# EAGLE board IAS_v005 (EAGLE 7.3.0)
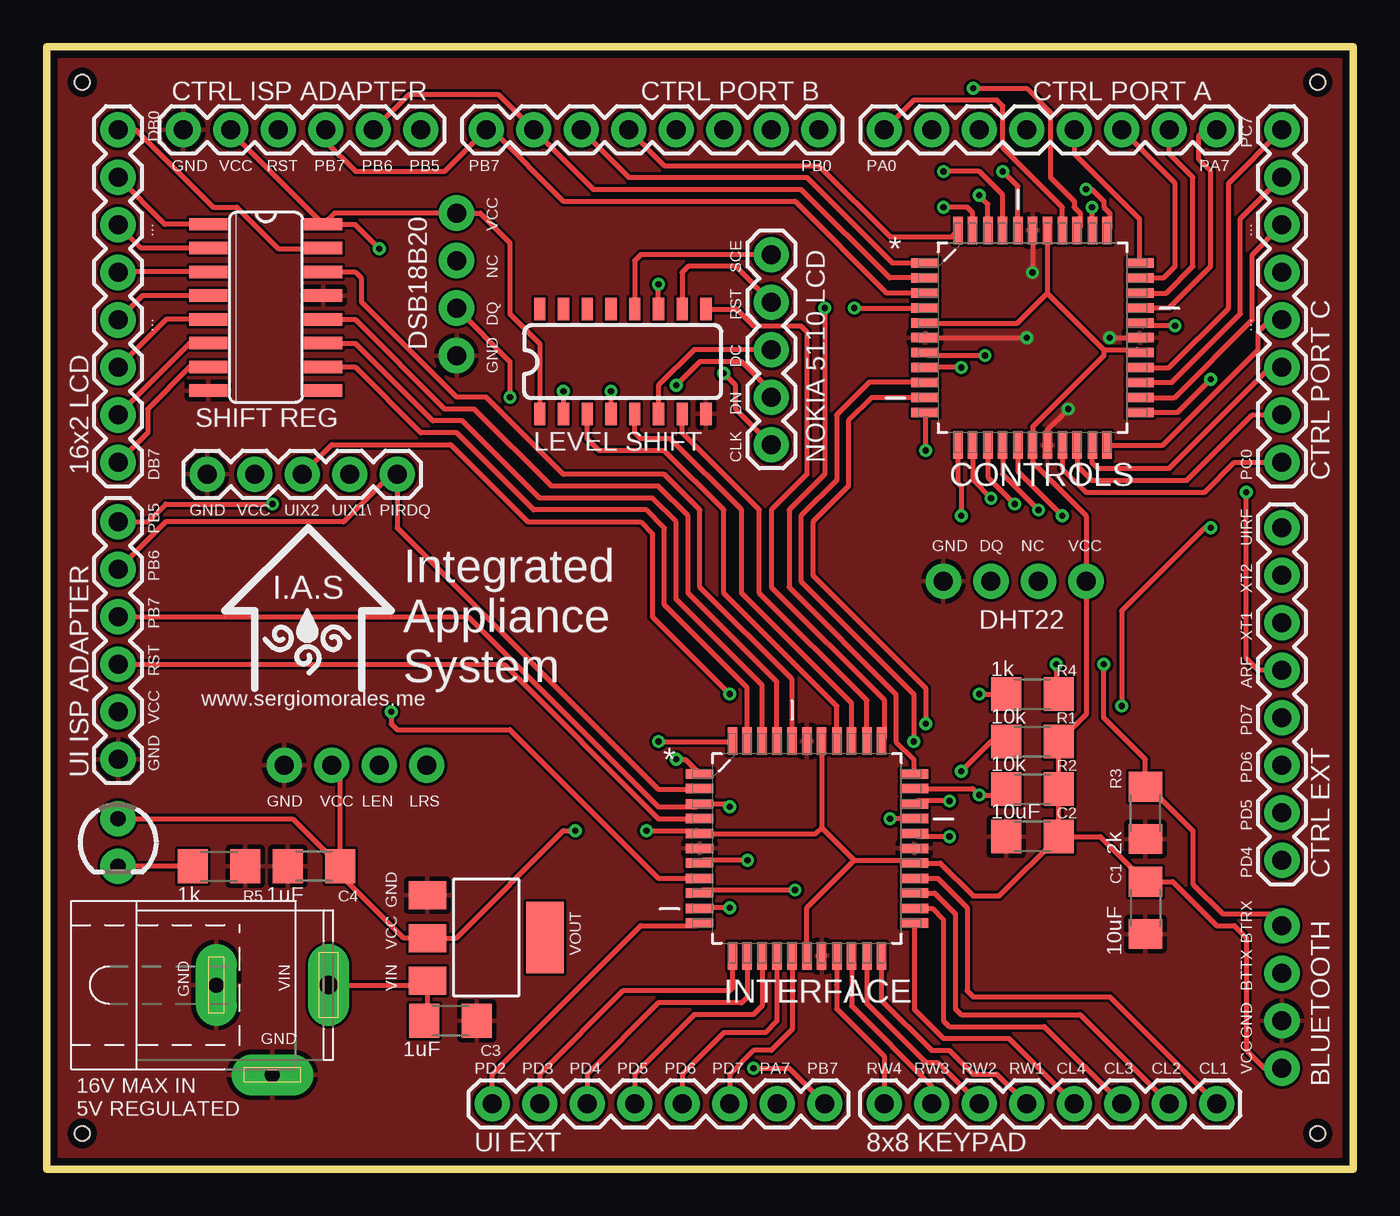
[diagram p0: board, top side]
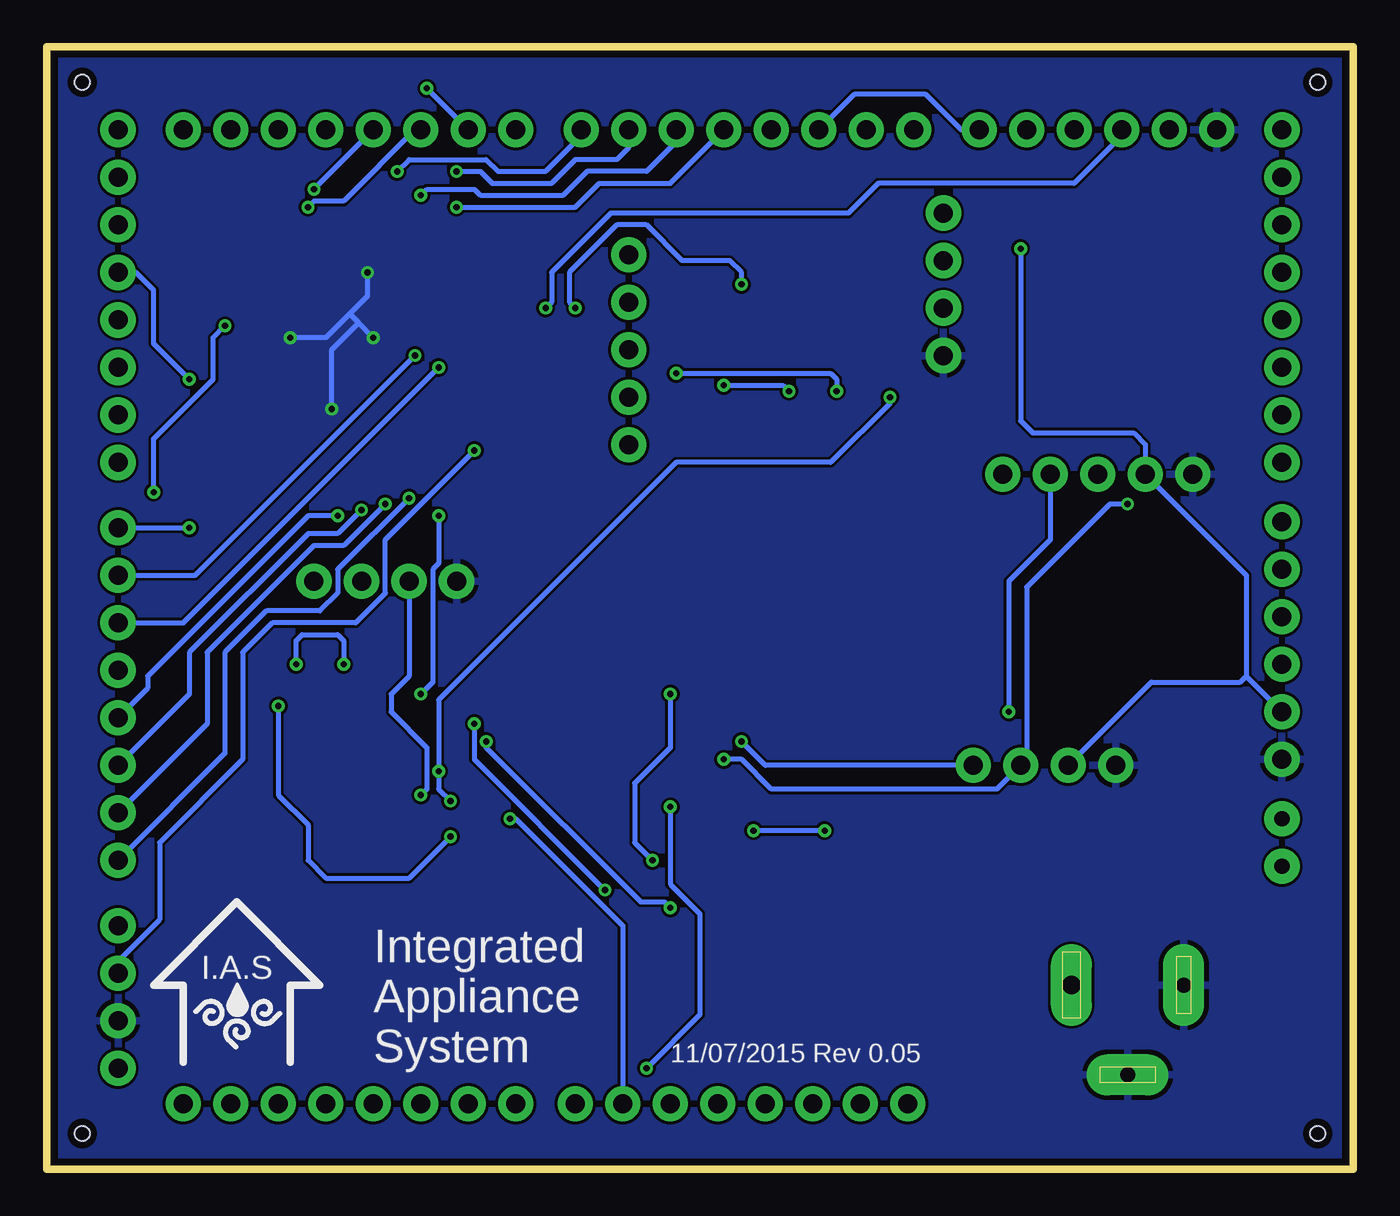
[diagram p1: board, bottom side, seen from below]

Size 69.85 x 60.01 mm. Coordinates in mm from the lower left corner, seen from the top.
Outline: 0,0 0,60.01 69.85,60.01 69.85,0 0,0
Copper layers (1*16): Top 0.0356mm / dielectric 1.5011mm / Bottom 0.0356mm
Design rules "LaenPCBOrder": minimum track width 6mil, minimum drill 13mil, track to track 6mil, track to pad 6mil, pad to pad 6mil, via to via 6mil, smd to smd 6mil, copper to edge 15mil, drill to drill 6mil, minimum pad ring 7mil, minimum via ring 7mil, stop-mask expansion 3mil, vias tented up to drill 0mil, thermal gap 10mil
Holes 0.8 mm at 67.94,58.1 1.91,58.1 67.94,1.91 1.91,1.91

## Footprints (pad centres in the part's own frame; a part is rotated, then mirrored left to right if it is on the bottom)
SO016 = smd 0.6 x 1.2: 1 -4.445,-2.8; 2 -3.175,-2.8; 3 -1.905,-2.8; 4 -0.635,-2.8; 5 0.635,-2.8; 6 1.905,-2.8; 7 3.175,-2.8; 8 4.445,-2.8; 9 4.445,2.8; 10 3.175,2.8; 11 1.905,2.8; 12 0.635,2.8; 13 -0.635,2.8; 14 -1.905,2.8; 15 -3.175,2.8; 16 -4.445,2.8
1X08_ROUND = drill 1.016 pad 1.88: 1 0,0; 2 2.54,0; 3 5.08,0; 4 7.62,0; 5 10.16,0; 6 12.7,0; 7 15.24,0; 8 17.78,0
1X04_NO_SILK_ALL_ROUND = drill 1.016 pad 1.88: 1 0,0; 2 2.54,0; 3 5.08,0; 4 7.62,0
SO16 = smd 0.66 x 2.032: 1 -4.445,-3.073; 2 -3.175,-3.073; 3 -1.905,-3.073; 4 -0.635,-3.073; 5 0.635,-3.073; 6 1.905,-3.073; 7 3.175,-3.073; 8 4.445,-3.073; 9 4.445,3.073; 10 3.175,3.073; 11 1.905,3.073; 12 0.635,3.073; 13 -0.635,3.073; 14 -1.905,3.073; 15 -3.175,3.073; 16 -4.445,3.073
1206 = smd 1.6 x 1.8: 1 -1.4,0; 2 1.4,0
QFP80P1200X1200X120-44N = smd 1.473 x 0.508: 1 -5.74,3.988; 2 -5.74,3.2; 3 -5.74,2.388; 4 -5.74,1.6; 5 -5.74,0.787; 6 -5.74,0; 7 -5.74,-0.787; 8 -5.74,-1.6; 9 -5.74,-2.388; 10 -5.74,-3.2; 11 -5.74,-3.988; 23 5.74,-3.988; 24 5.74,-3.2; 25 5.74,-2.388; 26 5.74,-1.6; 27 5.74,-0.787; 28 5.74,0; 29 5.74,0.787; 30 5.74,1.6; 31 5.74,2.388; 32 5.74,3.2; 33 5.74,3.988 | smd 0.508 x 1.473: 12 -3.988,-5.74; 13 -3.2,-5.74; 14 -2.388,-5.74; 15 -1.6,-5.74; 16 -0.787,-5.74; 17 0,-5.74; 18 0.787,-5.74; 19 1.6,-5.74; 20 2.388,-5.74; 21 3.2,-5.74; 22 3.988,-5.74; 34 3.988,5.74; 35 3.2,5.74; 36 2.388,5.74; 37 1.6,5.74; 38 0.787,5.74; 39 0,5.74; 40 -0.787,5.74; 41 -1.6,5.74; 42 -2.388,5.74; 43 -3.2,5.74; 44 -3.988,5.74
SOT223 = smd 1.499 x 2.007: 1 -2.261,-3.15; 2 0.025,-3.15; 3 2.311,-3.15 | smd 3.81 x 2.007: 4 0,3.15
1X06 = drill 1.016 pad 1.88: 1 0,0; 2 2.54,0; 3 5.08,0; 4 7.62,0; 5 10.16,0; 6 12.7,0
SPC4077 = drill 0.8 pad 2.184 long: 1 -3,0; 2 0,-4.8 | drill 1 pad 2.184 long: 3 3,0
1X05 = drill 1.016 pad 1.88: 1 0,0; 2 2.54,0; 3 5.08,0; 4 7.62,0; 5 10.16,0
LED3MM = drill 0.813 pad 1.88: A -1.27,0; K 1.27,0

## Placement (x,y rotation side)
5-3.3V_LOGIC_SHIFTER  HEX_CONVERTER  [SO016]  30.8,43.18 0 top
8X8_KEYPAD  [1X08_ROUND]  62.55,3.49 180 top
16X2_LCD  [1X08_ROUND]  3.81,37.78 90 top
16X2_LCD_ENABLE  [1X04_NO_SILK_ALL_ROUND]  20.32,21.59 180 top
74LS595D_SHIFT_REGISTER  74LS595D  [SO16]  11.71,46.07 270 top
BLUETOOTH_MODULE  [1X04_NO_SILK_ALL_ROUND]  66.04,5.4 90 top
C1  10uF  [1206]  58.74,13.97 270 top
C2  10uF  [1206]  52.7,17.78 180 top
C3  1uF  [1206]  21.59,7.94 0 top
C4  1uF  [1206]  14.29,16.19 180 top
CONTROLS  ATMEGA1284P-AU  [QFP80P1200X1200X120-44N]  52.7,44.45 0 top
CTRLS_EXT  [1X08_ROUND]  66.04,16.51 90 top
CTRLS_PORT_A  [1X08_ROUND]  44.77,55.56 0 top
CTRLS_PORT_B  [1X08_ROUND]  41.27,55.56 180 top
CTRLS_PORT_C  [1X08_ROUND]  66.04,37.78 90 top
DHT22_SENSOR  [1X04_NO_SILK_ALL_ROUND]  47.94,31.43 0 top
DSB18B20_SENSOR  [1X04_NO_SILK_ALL_ROUND]  21.91,43.5 90 top
IC1  REG1117  [SOT223]  23.5,12.38 270 top
INTERFACE  ATMEGA1284P-AU  [QFP80P1200X1200X120-44N]  40.64,17.14 0 top
ISP_ADAPTER_CTRLS  [1X06]  20,55.56 180 top
ISP_ADAPTER_UI  [1X06]  3.81,34.61 270 top
J1  [SPC4077]  12.06,9.84 0 top
NOKIA_5110_LCD  [1X05]  38.73,48.9 270 top
PIR_SENSOR_ETC  [1X05]  8.57,37.15 0 top
POWER  [LED3MM]  3.81,17.46 270 top
R1  10k  [1206]  52.7,22.86 0 top
R2  10k  [1206]  52.7,20.32 0 top
R3  2k  [1206]  58.74,19.05 90 top
R4  1k  [1206]  52.7,25.4 0 top
R5  1k  [1206]  9.21,16.19 0 top
UI_EXT  [1X08_ROUND]  23.81,3.49 0 top

## Library data of the parts
5-3.3V_LOGIC_SHIFTER = SparkFun-DigitalIC; MPN: 74HC4050D,652; OC_NEWARK: 71R2496; PROD_ID: IC-09604
8X8_KEYPAD 16X2_LCD 16X2_LCD_ENABLE BLUETOOTH_MODULE CTRLS_EXT CTRLS_PORT_A CTRLS_PORT_B CTRLS_PORT_C DHT22_SENSOR DSB18B20_SENSOR NOKIA_5110_LCD PIR_SENSOR_ETC UI_EXT = SparkFun-Connectors; OC_NEWARK: unknown
74LS595D_SHIFT_REGISTER = 74xx-us; MPN: SN74LS595D; OC_NEWARK: 34R8835
C1-C4 = SparkFun-Capacitors; OC_NEWARK: unknown
CONTROLS INTERFACE = Atmel_By_element14_Batch_1-00; OC_FARNELL: 1715480; OC_NEWARK: unknown; PACKAGE: TQFP-44; SUPPLIER: Atmel
IC1 = sergio; MPN: REG1117; OC_FARNELL: 1097566; OC_NEWARK: 14P6981
ISP_ADAPTER_CTRLS ISP_ADAPTER_UI = SparkFun-Connectors; OC_NEWARK: unknown; PROD_ID: CONN-08437
J1 = con-jack; OC_FARNELL: unknown; OC_NEWARK: unknown
POWER = SparkFun-LED
R1-R5 = SparkFun-Resistors; OC_NEWARK: unknown

## Nets
BT_RX: CONTROLS.12 R4.1
BT_TX: BLUETOOTH_MODULE.3 CONTROLS.11
COL1: 8X8_KEYPAD.1 INTERFACE.26
COL2: 8X8_KEYPAD.2 INTERFACE.25
COL3: 8X8_KEYPAD.3 INTERFACE.24
COL4: 8X8_KEYPAD.4 INTERFACE.23
CTRLS_AREF: CONTROLS.29 CTRLS_EXT.5
CTRLS_PA0: CONTROLS.37 CTRLS_PORT_A.1
CTRLS_PA1: CONTROLS.36 CTRLS_PORT_A.2
CTRLS_PA2: CONTROLS.35 CTRLS_PORT_A.3
CTRLS_PA3: CONTROLS.34 CTRLS_PORT_A.4
CTRLS_PA4: CONTROLS.33 CTRLS_PORT_A.5
CTRLS_PA5: CONTROLS.32 CTRLS_PORT_A.6
CTRLS_PA6: CONTROLS.31 CTRLS_PORT_A.7
CTRLS_PA7: CONTROLS.30 CTRLS_PORT_A.8
CTRLS_PB0: CONTROLS.40 CTRLS_PORT_B.1
CTRLS_PB1: CONTROLS.41 CTRLS_PORT_B.2
CTRLS_PB2: CONTROLS.42 CTRLS_PORT_B.3
CTRLS_PB3: CONTROLS.43 CTRLS_PORT_B.4
CTRLS_PB4: CONTROLS.44 CTRLS_PORT_B.5
CTRLS_PB5: CONTROLS.1 CTRLS_PORT_B.6 ISP_ADAPTER_CTRLS.1
CTRLS_PB6: CONTROLS.2 CTRLS_PORT_B.7 ISP_ADAPTER_CTRLS.2
CTRLS_PB7: CONTROLS.3 CTRLS_PORT_B.8 ISP_ADAPTER_CTRLS.3
CTRLS_PC0: CONTROLS.19 CTRLS_PORT_C.1
CTRLS_PC1: CONTROLS.20 CTRLS_PORT_C.2
CTRLS_PC2: CONTROLS.21 CTRLS_PORT_C.3
CTRLS_PC3: CONTROLS.22 CTRLS_PORT_C.4
CTRLS_PC4: CONTROLS.23 CTRLS_PORT_C.5
CTRLS_PC5: CONTROLS.24 CTRLS_PORT_C.6
CTRLS_PC6: CONTROLS.25 CTRLS_PORT_C.7
CTRLS_PC7: CONTROLS.26 CTRLS_PORT_C.8
CTRLS_PD4: CONTROLS.13 CTRLS_EXT.1
CTRLS_PD5: CONTROLS.14 CTRLS_EXT.2
CTRLS_PD6: CONTROLS.15 CTRLS_EXT.3
CTRLS_PD7: CONTROLS.16 CTRLS_EXT.4
CTRLS_RST: CONTROLS.4 ISP_ADAPTER_CTRLS.4
CTRLS_XTAL1: CONTROLS.8 CTRLS_EXT.6
CTRLS_XTAL2: CONTROLS.7 CTRLS_EXT.7
DB0: 16X2_LCD.8 74LS595D_SHIFT_REGISTER.15
DB1: 16X2_LCD.7 74LS595D_SHIFT_REGISTER.1
DB2: 16X2_LCD.6 74LS595D_SHIFT_REGISTER.2
DB3: 16X2_LCD.5 74LS595D_SHIFT_REGISTER.3
DB4: 16X2_LCD.4 74LS595D_SHIFT_REGISTER.4
DB5: 16X2_LCD.3 74LS595D_SHIFT_REGISTER.5
DB6: 16X2_LCD.2 74LS595D_SHIFT_REGISTER.6
DB7: 16X2_LCD.1 74LS595D_SHIFT_REGISTER.7
DHT22_DQ: DHT22_SENSOR.2 INTERFACE.32 R2.1
DS18B20_DQ: DSB18B20_SENSOR.2 INTERFACE.31 R1.1
GND: 5-3.3V_LOGIC_SHIFTER.8 16X2_LCD_ENABLE.4 74LS595D_SHIFT_REGISTER.8 74LS595D_SHIFT_REGISTER.13 BLUETOOTH_MODULE.2 C1.2 C2.2 C3.2 C4.2 CONTROLS.6 CONTROLS.18 CONTROLS.28 CONTROLS.39 DHT22_SENSOR.1 DSB18B20_SENSOR.1 IC1.1 INTERFACE.6 INTERFACE.18 INTERFACE.28 INTERFACE.39 ISP_ADAPTER_CTRLS.6 ISP_ADAPTER_UI.6 J1.1 J1.2 PIR_SENSOR_ETC.1 R3.1 R5.2
LCD_EN: 16X2_LCD_ENABLE.2 INTERFACE.1 ISP_ADAPTER_UI.1
LCD_RS: 16X2_LCD_ENABLE.1 INTERFACE.44
N$2: POWER.K R5.1
N$7: BLUETOOTH_MODULE.4 R3.2 R4.2
NDC: 5-3.3V_LOGIC_SHIFTER.6 NOKIA_5110_LCD.3
NDN: 5-3.3V_LOGIC_SHIFTER.4 NOKIA_5110_LCD.4
NLCD_DC: 5-3.3V_LOGIC_SHIFTER.7 INTERFACE.35
NLCD_DN: 5-3.3V_LOGIC_SHIFTER.5 INTERFACE.36
NLCD_RST: 5-3.3V_LOGIC_SHIFTER.9 INTERFACE.34
NLCD_SCE: 5-3.3V_LOGIC_SHIFTER.11 INTERFACE.33
NLCD_SCLK: 5-3.3V_LOGIC_SHIFTER.3 INTERFACE.37
NRST: 5-3.3V_LOGIC_SHIFTER.10 NOKIA_5110_LCD.2
NSCE: 5-3.3V_LOGIC_SHIFTER.12 NOKIA_5110_LCD.1
NSCLK: 5-3.3V_LOGIC_SHIFTER.2 NOKIA_5110_LCD.5
PIR_DQ: INTERFACE.2 ISP_ADAPTER_UI.2 PIR_SENSOR_ETC.5
RCK: 74LS595D_SHIFT_REGISTER.12 INTERFACE.41
ROW1: 8X8_KEYPAD.5 INTERFACE.22
ROW2: 8X8_KEYPAD.6 INTERFACE.21
ROW3: 8X8_KEYPAD.7 INTERFACE.20
ROW4: 8X8_KEYPAD.8 INTERFACE.19
SCK: 74LS595D_SHIFT_REGISTER.11 INTERFACE.42
SCL: 74LS595D_SHIFT_REGISTER.10 INTERFACE.43
SER: 74LS595D_SHIFT_REGISTER.14 INTERFACE.40
UI_AREF: CTRLS_EXT.8 INTERFACE.29
UI_PA7: INTERFACE.30 UI_EXT.7
UI_PB7: INTERFACE.3 ISP_ADAPTER_UI.3 UI_EXT.8
UI_PD2: INTERFACE.11 UI_EXT.1
UI_PD3: INTERFACE.12 UI_EXT.2
UI_PD4: INTERFACE.13 UI_EXT.3
UI_PD5: INTERFACE.14 UI_EXT.4
UI_PD6: INTERFACE.15 UI_EXT.5
UI_PD7: INTERFACE.16 UI_EXT.6
UI_RST: INTERFACE.4 ISP_ADAPTER_UI.4
UI_XTAL1: INTERFACE.8 PIR_SENSOR_ETC.4
UI_XTAL2: INTERFACE.7 PIR_SENSOR_ETC.3
USART_D0: CONTROLS.10 INTERFACE.9
USART_D1: CONTROLS.9 INTERFACE.10
VCC: 5-3.3V_LOGIC_SHIFTER.1 16X2_LCD_ENABLE.3 74LS595D_SHIFT_REGISTER.16 BLUETOOTH_MODULE.1 C1.1 C2.1 C4.1 CONTROLS.5 CONTROLS.17 CONTROLS.27 CONTROLS.38 DHT22_SENSOR.4 DSB18B20_SENSOR.4 IC1.2 INTERFACE.5 INTERFACE.17 INTERFACE.27 INTERFACE.38 ISP_ADAPTER_CTRLS.5 ISP_ADAPTER_UI.5 PIR_SENSOR_ETC.2 POWER.A R1.2 R2.2
VIN: C3.1 IC1.3 J1.3

## Tracks (layer width: path | path; a pad name or v marks a point on that pad's centre or on a via)
BT_RX  (via drill 0.33)
  Top 0.254: v49.85,25.4 R4.1 | CONTROLS.12 48.72,36.69 48.9,36.51 v48.9,34.92
  Bottom 0.254: v48.9,34.92 48.9,32.38 49.21,32.07 49.21,26.04 v49.85,25.4
BT_TX  (via drill 0.33)
  Top 0.254: v46.99,38.42 46.99,40.44 CONTROLS.11
  Bottom 0.254: BLUETOOTH_MODULE.3 66.04,11.11 63.82,13.34 63.82,17.46 59.37,21.91 59.37,27.62 57.78,29.21 53.34,29.21 51.75,30.8 51.75,33.66 v46.99,38.42
COL1
  Top 0.254: INTERFACE.26 47.64,15.54 49.21,13.97 49.21,9.53 49.53,9.21 56.83,9.21 8X8_KEYPAD.1
COL2
  Top 0.254: INTERFACE.25 47.47,14.76 48.58,13.65 48.58,8.57 48.9,8.26 55.24,8.26 8X8_KEYPAD.2
COL3
  Top 0.254: INTERFACE.24 47.33,13.95 47.94,13.34 47.94,7.94 48.26,7.62 53.34,7.62 8X8_KEYPAD.3
COL4
  Top 0.254: INTERFACE.23 46.38,8.55 47.94,6.99 51.44,6.99 8X8_KEYPAD.4
CTRLS_AREF  (via drill 0.33)
  Top 0.254: CTRLS_EXT.5 64.77,26.67 64.14,27.3 v64.14,36.2 | v60.33,45.09 58.6,45.09 CONTROLS.29
  Bottom 0.254: v64.14,36.2 64.14,39.05 60.96,42.23 60.96,44.45 v60.33,45.09
CTRLS_PA0
  Top 0.254: CONTROLS.37 54.3,51.42 51.12,54.61 51.12,56.83 50.8,57.15 46.35,57.15 CTRLS_PORT_A.1
CTRLS_PA1  (via drill 0.33)
  Top 0.254: v49.53,57.78 52.39,57.78 53.66,56.52 53.66,53.02 54.93,51.75 54.93,51.44 55.24,51.12 55.24,50.34 CONTROLS.36
  Bottom 0.254: CTRLS_PORT_A.2 v49.53,57.78
CTRLS_PA2  (via drill 0.33)
  Top 0.254: v55.88,51.44 55.88,50.22 CONTROLS.35
  Bottom 0.254: CTRLS_PORT_A.3 50.16,55.56 53.98,51.75 55.56,51.75 v55.88,51.44
CTRLS_PA3  (via drill 0.33)
  Top 0.254: v55.56,52.39 55.88,52.39 56.52,51.75 56.52,51.44 56.83,51.12 56.83,50.33 CONTROLS.34
  Bottom 0.254: CTRLS_PORT_A.4 v55.56,52.39
CTRLS_PA4
  Top 0.254: CTRLS_PORT_A.5 54.93,54.29 58.42,50.8 58.42,48.46 CONTROLS.33
CTRLS_PA5
  Top 0.254: CONTROLS.32 59.72,47.65 60.33,48.26 60.33,52.7 CTRLS_PORT_A.6
CTRLS_PA6
  Top 0.254: CONTROLS.31 59.85,46.84 61.28,48.26 61.28,53.02 60.01,54.29 CTRLS_PORT_A.7
CTRLS_PA7
  Top 0.254: CONTROLS.30 60.02,46.05 62.23,48.26 62.23,53.34 61.59,53.98 61.59,55.24 61.91,55.56 CTRLS_PORT_A.8
CTRLS_PB0  (via drill 0.33)
  Top 0.254: CONTROLS.40 51.92,52.54 v51.12,53.34
  Bottom 0.254: CTRLS_PORT_B.1 41.27,55.24 43.18,53.34 45.72,53.34 46.35,53.98 50.48,53.98 v51.12,53.34
CTRLS_PB1  (via drill 0.33)
  Top 0.254: CONTROLS.41 51.1,52.08 49.85,53.34 v47.94,53.34
  Bottom 0.254: CTRLS_PORT_B.2 38.73,54.61 39.37,53.98 41.59,53.98 42.86,52.7 46.04,52.7 46.67,53.34 v47.94,53.34
CTRLS_PB2  (via drill 0.33)
  Top 0.254: CONTROLS.42 50.32,51.6 v49.85,52.07
  Bottom 0.254: CTRLS_PORT_B.3 36.2,54.93 37.78,53.34 40.96,53.34 42.23,52.07 46.67,52.07 46.99,52.39 49.53,52.39 v49.85,52.07
CTRLS_PB3  (via drill 0.33)
  Top 0.254: CONTROLS.43 49.51,51.14 49.21,51.44 v47.94,51.44
  Bottom 0.254: v47.94,51.44 41.59,51.44 40.32,52.7 36.51,52.7 CTRLS_PORT_B.4
CTRLS_PB4
  Top 0.254: CTRLS_PORT_B.5 33.02,53.66 41.27,53.66 45.09,49.85 48.37,49.85 CONTROLS.44
CTRLS_PB5
  Top 0.254: CONTROLS.1 45.23,48.44 40.64,53.02 31.11,53.02 CTRLS_PORT_B.6
  Bottom 0.254: ISP_ADAPTER_CTRLS.1 20.95,55.56 22.86,57.47 26.67,57.47 CTRLS_PORT_B.6
CTRLS_PB6
  Top 0.254: ISP_ADAPTER_CTRLS.2 19.37,57.47 24.13,57.47 CTRLS_PORT_B.7 29.21,52.39 40.32,52.39 45.06,47.65 CONTROLS.2
CTRLS_PB7
  Top 0.254: ISP_ADAPTER_CTRLS.3 14.92,54.93 16.51,53.34 21.27,53.34 CTRLS_PORT_B.8 23.81,55.56 27.62,51.75 40.01,51.75 44.92,46.84 CONTROLS.3
CTRLS_PC0
  Top 0.254: CONTROLS.19 54.3,37.45 55.56,36.2 61.91,36.2 63.5,37.78 CTRLS_PORT_C.1
CTRLS_PC1
  Top 0.254: CONTROLS.20 55.09,37.62 55.88,36.83 60.96,36.83 64.45,40.32 CTRLS_PORT_C.2
CTRLS_PC2
  Top 0.254: CONTROLS.21 55.88,38.73 55.88,37.78 56.2,37.47 60.01,37.47 65.41,42.86 CTRLS_PORT_C.3
CTRLS_PC3
  Top 0.254: CONTROLS.22 59.66,38.71 64.77,43.81 64.77,44.77 65.41,45.4 CTRLS_PORT_C.4
CTRLS_PC4  (via drill 0.33)
  Top 0.254: CONTROLS.23 60.47,40.46 v62.23,42.23
  Bottom 0.254: v62.23,42.23 64.14,44.13 64.14,46.99 65.09,47.94 CTRLS_PORT_C.5
CTRLS_PC5
  Top 0.254: CONTROLS.24 60.3,41.25 64.45,45.4 64.45,48.9 CTRLS_PORT_C.6
CTRLS_PC6
  Top 0.254: CONTROLS.25 60.16,42.06 63.82,45.72 63.82,50.8 CTRLS_PORT_C.7
CTRLS_PC7
  Top 0.254: CONTROLS.26 59.99,42.85 63.18,46.04 63.18,52.7 CTRLS_PORT_C.8
CTRLS_PD4  (via drill 0.33)
  Top 0.254: CONTROLS.13 49.51,36.85 v50.48,35.88
  Bottom 0.254: v50.48,35.88 54.29,32.07 54.29,30.8 55.24,29.84 58.1,29.84 60.33,27.62 60.33,22.23 CTRLS_EXT.1
CTRLS_PD5  (via drill 0.33)
  Top 0.254: CONTROLS.14 50.32,36.99 v51.75,35.56
  Bottom 0.254: v51.75,35.56 53.98,33.34 55.56,33.34 61.28,27.62 61.28,23.81 CTRLS_EXT.2
CTRLS_PD6  (via drill 0.33)
  Top 0.254: CONTROLS.15 51.1,37.16 v53.02,35.24
  Bottom 0.254: v53.02,35.24 54.29,33.97 55.88,33.97 62.23,27.62 62.23,25.4 CTRLS_EXT.3
CTRLS_PD7  (via drill 0.33)
  Top 0.254: CONTROLS.16 51.92,37.3 v54.29,34.92
  Bottom 0.254: v54.29,34.92 55.88,34.92 64.45,26.35 64.45,25.72 CTRLS_EXT.4
CTRLS_RST  (via drill 0.33)
  Top 0.254: v43.18,46.04 46.95,46.04 CONTROLS.4
  Bottom 0.254: ISP_ADAPTER_CTRLS.4 12.38,55.24 14.92,52.7 25.4,52.7 26.99,51.12 39.69,51.12 42.86,47.94 42.86,46.35 v43.18,46.04
CTRLS_XTAL1  (via drill 0.33)
  Top 0.254: v48.9,42.86 46.98,42.86 CONTROLS.8
  Bottom 0.254: CTRLS_EXT.6 62.55,29.21 v48.9,42.86
CTRLS_XTAL2  (via drill 0.33)
  Top 0.254: v50.16,43.5 47.13,43.5 CONTROLS.7
  Bottom 0.254: CTRLS_EXT.7 61.91,31.75 v50.16,43.5
DB0
  Top 0.254: 16X2_LCD.8 4.76,55.56 8.89,51.44 10.16,51.44 12.38,49.21 14.76,49.21 74LS595D_SHIFT_REGISTER.15
DB1
  Top 0.254: 74LS595D_SHIFT_REGISTER.1 6.32,50.51 16X2_LCD.7
DB2
  Top 0.254: 74LS595D_SHIFT_REGISTER.2 5.05,49.24 16X2_LCD.6
DB3
  Top 0.254: 74LS595D_SHIFT_REGISTER.3 3.84,47.97 16X2_LCD.5
DB4
  Top 0.254: 74LS595D_SHIFT_REGISTER.4 5.11,46.7 16X2_LCD.4
DB5
  Top 0.254: 74LS595D_SHIFT_REGISTER.5 6.38,45.43 16X2_LCD.3
DB6
  Top 0.254: 74LS595D_SHIFT_REGISTER.6 7.65,44.16 16X2_LCD.2
DB7
  Top 0.254: 74LS595D_SHIFT_REGISTER.7 7.65,42.89 5.4,40.64 5.4,39.37 16X2_LCD.1
DHT22_DQ  (via drill 0.33)
  Top 0.254: R2.1 50.99,20 v49.85,20 49.51,20.34 INTERFACE.32
  Bottom 0.254: DHT22_SENSOR.2 50.48,26.35 51.44,25.4 51.44,24.45 49.53,22.54 49.53,20.32 v49.85,20
DS18B20_DQ  (via drill 0.33)
  Top 0.254: R1.1 50.48,22.86 v48.9,21.27 | v48.26,19.68 46.53,19.68 INTERFACE.31 | DSB18B20_SENSOR.2 24.77,43.18 v24.77,41.27
  Bottom 0.254: v48.26,19.68 48.9,20.32 v48.9,21.27 48.9,25.08 36.2,37.78 27.94,37.78 24.77,40.96 v24.77,41.27
GND  (via drill 0.33)
  Top 0.254: CONTROLS.39 v52.7,47.94 | v56.83,44.45 CONTROLS.28 | CONTROLS.6 v52.39,44.45 | CONTROLS.18 53.49,39.52 v54.61,40.64
  Bottom 0.254: v52.7,47.94 52.7,46.67 53.66,45.72 | 53.66,45.72 54.93,44.45 v56.83,44.45 | v52.39,44.45 53.18,45.24 | 53.18,45.24 53.66,45.72 | v54.61,40.64 54.61,43.81 53.18,45.24
  pour Top: -1.91,61.28 -1.91,-1.91 71.75,-1.91 71.75,61.28
  pour Bottom: -5.08,62.23 74.3,62.23 74.3,-7.3 -5.08,-7.3
LCD_EN  (via drill 0.33)
  Top 0.254: ISP_ADAPTER_UI.1 5.4,34.61 6.35,35.56 v12.06,35.56 | v33.66,21.91 34.12,21.91 INTERFACE.1
  Bottom 0.254: v12.06,35.56 13.02,35.56 17.46,31.11 17.46,21.91 16X2_LCD_ENABLE.2 19.05,20.32 31.11,20.32 32.7,21.91 v33.66,21.91
LCD_RS  (via drill 0.33)
  Top 0.254: v32.7,22.86 36.63,22.86 INTERFACE.44
  Bottom 0.254: 16X2_LCD_ENABLE.1 31.43,21.59 v32.7,22.86
N$2
  Top 0.254: R5.1 POWER.K
N$7  (via drill 0.33)
  Top 0.254: BLUETOOTH_MODULE.4 65.41,13.65 62.87,13.65 61.28,15.24 61.28,18.1 58.92,20.45 R3.2 58.74,21.91 56.52,24.13 v56.52,26.99 | v53.98,26.99 53.98,25.53 R4.2
  Bottom 0.254: v56.52,26.99 56.52,28.26 56.2,28.57 54.29,28.57 53.98,28.26 v53.98,26.99
NDC
  Top 0.254: NOKIA_5110_LCD.3 34.61,43.81 32.7,41.91 5-3.3V_LOGIC_SHIFTER.6
NDN  (via drill 0.33)
  Top 0.254: NOKIA_5110_LCD.4 38.73,41.59 37.15,43.18 34.92,43.18 v33.66,41.91 | v30.16,41.59 5-3.3V_LOGIC_SHIFTER.4
  Bottom 0.254: v33.66,41.91 30.48,41.91 v30.16,41.59
NLCD_DC
  Top 0.254: INTERFACE.35 43.84,25.06 38.1,30.8 38.1,35.24 33.97,39.37 5-3.3V_LOGIC_SHIFTER.7
NLCD_DN
  Top 0.254: INTERFACE.36 43.03,24.92 37.15,30.8 37.15,35.24 33.34,39.05 31.75,39.05 31.43,39.37 5-3.3V_LOGIC_SHIFTER.5
NLCD_RST
  Top 0.254: 5-3.3V_LOGIC_SHIFTER.9 36.89,45.98 37.78,45.09 40.32,45.09 40.64,44.77 40.64,37.15 38.73,35.24 38.73,31.11 44.77,25.08 44.77,23.02 INTERFACE.34
NLCD_SCE  (via drill 0.33)
  Top 0.254: 5-3.3V_LOGIC_SHIFTER.11 v32.7,47.31 | v41.59,46.04 41.59,37.15 39.69,35.24 39.69,31.11 45.4,25.4 45.4,22.86 46.35,21.91 46.35,21.16 INTERFACE.33
  Bottom 0.254: v32.7,47.31 32.7,47.94 33.34,48.58 35.88,48.58 37.78,50.48 39.37,50.48 41.91,47.94 41.91,46.35 v41.59,46.04
NLCD_SCLK
  Top 0.254: INTERFACE.37 42.24,24.75 36.2,30.8 36.2,35.24 33.02,38.42 29.53,38.42 28.89,39.05 5-3.3V_LOGIC_SHIFTER.3
NRST
  Top 0.254: NOKIA_5110_LCD.2 36.83,48.26 34.29,48.26 33.97,47.94 5-3.3V_LOGIC_SHIFTER.10
NSCE
  Top 0.254: NOKIA_5110_LCD.1 31.75,48.9 31.43,48.58 5-3.3V_LOGIC_SHIFTER.12
NSCLK  (via drill 0.33)
  Top 0.254: NOKIA_5110_LCD.5 36.83,40.64 36.83,41.91 v36.2,42.55 | v27.62,41.59 5-3.3V_LOGIC_SHIFTER.2
  Bottom 0.254: v36.2,42.55 27.94,42.55 27.62,42.23 v27.62,41.59
PIR_DQ
  Top 0.254: ISP_ADAPTER_UI.2 6.35,34.61 15.88,34.61 18.41,37.15 PIR_SENSOR_ETC.5 18.73,34.29 32.7,20.32 34.87,20.32 INTERFACE.2
RCK
  Top 0.254: INTERFACE.41 39.04,26.05 34.29,30.8 34.29,34.92 32.7,36.51 26.99,36.51 22.86,40.64 21.27,40.64 16.51,45.4 14.82,45.4 74LS595D_SHIFT_REGISTER.12
ROW1
  Top 0.254: INTERFACE.22 44.63,9.03 47.31,6.35 48.26,6.35 49.53,5.08 50.8,5.08 8X8_KEYPAD.5
ROW2
  Top 0.254: INTERFACE.21 43.84,8.91 43.81,8.89 46.99,5.71 47.62,5.71 8X8_KEYPAD.6
ROW3
  Top 0.254: INTERFACE.20 43.03,8.72 47.31,4.45 8X8_KEYPAD.7
ROW4
  Top 0.254: INTERFACE.19 42.24,9.86 42.23,9.84 42.23,8.57 44.77,6.03 8X8_KEYPAD.8
SCK
  Top 0.254: INTERFACE.42 38.25,25.88 33.66,30.48 33.66,34.61 32.38,35.88 26.35,35.88 22.23,40.01 20.64,40.01 16.51,44.13 14.82,44.13 74LS595D_SHIFT_REGISTER.11
SCL
  Top 0.254: INTERFACE.43 37.44,25.74 33.02,30.16 33.02,34.29 32.07,35.24 26.04,35.24 21.91,39.37 20,39.37 16.51,42.86 14.82,42.86 74LS595D_SHIFT_REGISTER.10
SER
  Top 0.254: INTERFACE.40 39.85,26.19 34.92,31.11 34.92,35.24 33.02,37.15 27.62,37.15 23.5,41.27 21.91,41.27 16.83,46.35 16.83,47.62 16.51,47.94 14.82,47.94 74LS595D_SHIFT_REGISTER.14
UI_AREF  (via drill 0.33)
  Top 0.254: v62.23,34.29 61.91,34.29 57.47,29.84 v57.47,24.77 | v48.26,17.78 46.53,17.78 INTERFACE.29
  Bottom 0.254: CTRLS_EXT.8 v62.23,34.29 | v57.47,24.77 57.47,20 55.88,18.41 55.88,16.51 54.93,15.56 50.48,15.56 v48.26,17.78
UI_PA7  (via drill 0.33)
  Top 0.254: INTERFACE.30 45.1,18.75 v45.09,18.73
  Bottom 0.254: v45.09,18.73 44.77,18.73 39.05,13.02 UI_EXT.7
UI_PB7  (via drill 0.33)
  Top 0.254: v36.51,19.37 36.35,19.53 INTERFACE.3 34.73,19.37 32.7,19.37 22.54,29.53 ISP_ADAPTER_UI.3 | v37.78,5.4 39.69,5.4 UI_EXT.8
  Bottom 0.254: v36.51,19.37 36.51,15.24 34.92,13.65 34.92,8.26 v37.78,5.4
UI_PD2
  Top 0.254: UI_EXT.1 23.81,5.08 31.75,13.02 34.76,13.02 INTERFACE.11
UI_PD3
  Top 0.254: INTERFACE.12 36.65,9.66 36.51,9.53 30.8,9.53 26.35,5.08 UI_EXT.2
UI_PD4
  Top 0.254: INTERFACE.13 37.44,9.18 37.15,8.89 32.7,8.89 28.89,5.08 UI_EXT.3
UI_PD5
  Top 0.254: INTERFACE.14 38.25,8.72 37.78,8.26 34.61,8.26 31.43,5.08 UI_EXT.4
UI_PD6
  Top 0.254: INTERFACE.15 39.04,7.92 38.42,7.3 36.2,7.3 33.97,5.08 UI_EXT.5
UI_PD7
  Top 0.254: INTERFACE.16 39.85,7.47 38.73,6.35 37.78,6.35 36.51,5.08 UI_EXT.6
UI_RST
  Top 0.254: ISP_ADAPTER_UI.4 24.45,26.99 32.7,18.73 34.89,18.73 INTERFACE.4
UI_XTAL1  (via drill 0.33)
  Top 0.254: v18.41,24.45 18.41,23.81 18.73,23.5 24.77,23.5 32.7,15.56 34.89,15.56 INTERFACE.8
  Bottom 0.254: PIR_SENSOR_ETC.4 16.19,33.66 18.41,31.43 v18.41,24.45
UI_XTAL2  (via drill 0.33)
  Top 0.254: PIR_SENSOR_ETC.3 15.24,38.73 21.59,38.73 25.72,34.61 31.75,34.61 32.38,33.97 32.38,29.53 v36.51,25.4 | v37.47,16.51 35.05,16.51 INTERFACE.7
  Bottom 0.254: v37.47,16.51 38.42,17.46 38.42,20.64 36.51,22.54 v36.51,25.4
USART_D0  (via drill 0.33)
  Top 0.254: CONTROLS.10 44.11,41.25 42.86,40.01 42.86,36.51 40.96,34.61 40.96,31.75 46.99,25.72 v46.99,23.81 | v40.01,14.92 35.06,14.92 INTERFACE.9
  Bottom 0.254: v46.99,23.81 46.99,21.91 v40.01,14.92
USART_D1  (via drill 0.33)
  Top 0.254: CONTROLS.9 43.97,42.06 42.23,40.32 42.23,36.83 40.32,34.92 40.32,31.43 46.35,25.4 v46.35,22.86 | v36.51,13.97 34.92,13.97 INTERFACE.10
  Bottom 0.254: v46.35,22.86 46.35,22.54 38.1,14.29 36.83,14.29 v36.51,13.97
VCC  (via drill 0.33)
  Top 0.254: C4.1 15.69,21.14 16X2_LCD_ENABLE.3 | ISP_ADAPTER_CTRLS.5 9.84,55.46 74LS595D_SHIFT_REGISTER.16 | CONTROLS.38 53.49,46.84 | 53.49,46.84 56.52,43.81 | 56.52,43.81 58.29,43.81 CONTROLS.27 | CONTROLS.5 51.89,45.24 53.49,46.84 | 56.52,43.81 56.52,43.5 52.7,39.69 CONTROLS.17 52.7,37.78 55.56,34.92 DHT22_SENSOR.4 55.56,24.32 R1.2 R2.2 C2.1 | 74LS595D_SHIFT_REGISTER.16 15.39,51.12 DSB18B20_SENSOR.4 23.18,51.12 24.77,49.53 24.77,45.72 26.35,44.13 5-3.3V_LOGIC_SHIFTER.1 | 74LS595D_SHIFT_REGISTER.16 16.48,50.51 v17.78,49.21 | C2.1 56.33,17.78 C1.1 60.2,15.37 62.55,13.02 63.5,13.02 64.14,12.38 64.14,6.35 65.09,5.4 BLUETOOTH_MODULE.1 | C2.1 50.93,14.61 49.53,14.61 47.78,16.36 INTERFACE.27 46.23,16.51 43.18,16.51 | INTERFACE.38 41.43,18.26 | 41.43,18.26 43.18,16.51 | INTERFACE.17 40.64,13.97 43.18,16.51 | 41.43,18.26 41.1,17.93 INTERFACE.5 34.73,18.1 v32.07,18.1 | C4.1 15.69,15.74 19.05,12.38 20.32,12.38 IC1.2 21.88,12.36 27.62,18.1 v28.26,18.1 | POWER.A 13.15,18.73 C4.1
  Bottom 0.254: v17.78,49.21 17.78,40.01 17.14,39.37 11.75,39.37 11.11,38.73 PIR_SENSOR_ETC.2 5.71,31.75 5.71,26.35 | 5.71,26.35 ISP_ADAPTER_UI.5 | v28.26,18.1 v32.07,18.1 | 5.71,26.35 6.03,26.04 10.79,26.04 16X2_LCD_ENABLE.3
VIN
  Top 0.254: J1.3 20.12,9.84 IC1.3 20.34,8.09 C3.1

## Text on the board
tPlace: I.A.S | Integrated / Appliance / System
bPlace: I.A.S | 11/07/2015 Rev 0.05 | Integrated / Appliance / System
tNames: CTRL ISP ADAPTER | CTRL PORT B | CTRL PORT A | DB0 | PC7 | GND | VCC | RST | PB7 | PB6 | PB5 | PB7 | PB0 | PA0 | PA7 | ... | VCC | ... | NC | SCE | ... | DQ | RST | ... | DSB18B20 | GND | DC | SHIFT REG | DN | LEVEL SHIFT | CLK | NOKIA 5110 LCD | 16x2 LCD | DB7 | PC0 | CTRL PORT C | GND | VCC | UIX2 | UIX1\ | PIRDQ | PB5 | GND | DQ | NC | VCC | UIRF | PB6 | XT2 | PB7 | DHT22 | XT1 | RST | ARF | www.sergiomorales.me | VCC | PD7 | UI ISP ADAPTER | GND | PD6 | GND | VCC | LEN | LRS | PD5 | PD4 | CTRL EXT | GND | VCC | BTRX | VOUT | VIN | VIN | BTTX | GND | GND | GND | PD2 | PD3 | PD4 | PD5 | PD6 | PD7 | PA7 | PB7 | RW4 | RW3 | RW2 | RW1 | CL4 | CL3 | CL2 | CL1 | VCC | BLUETOOTH | 16V MAX IN / 5V REGULATED | UI EXT | 8x8 KEYPAD